# Altium PCB WPT_Transmitter.PcbDoc
Units mil, origin at the board's own origin, x right, y up, seen from the top; angles counter-clockwise.
Board outline 1110 x 1190 mil, 2 copper layers (Top Layer, Bottom Layer); 13 components, 7 nets, 33 pads, 0 vias.
Unrouted connection lines stored in the file: 1.
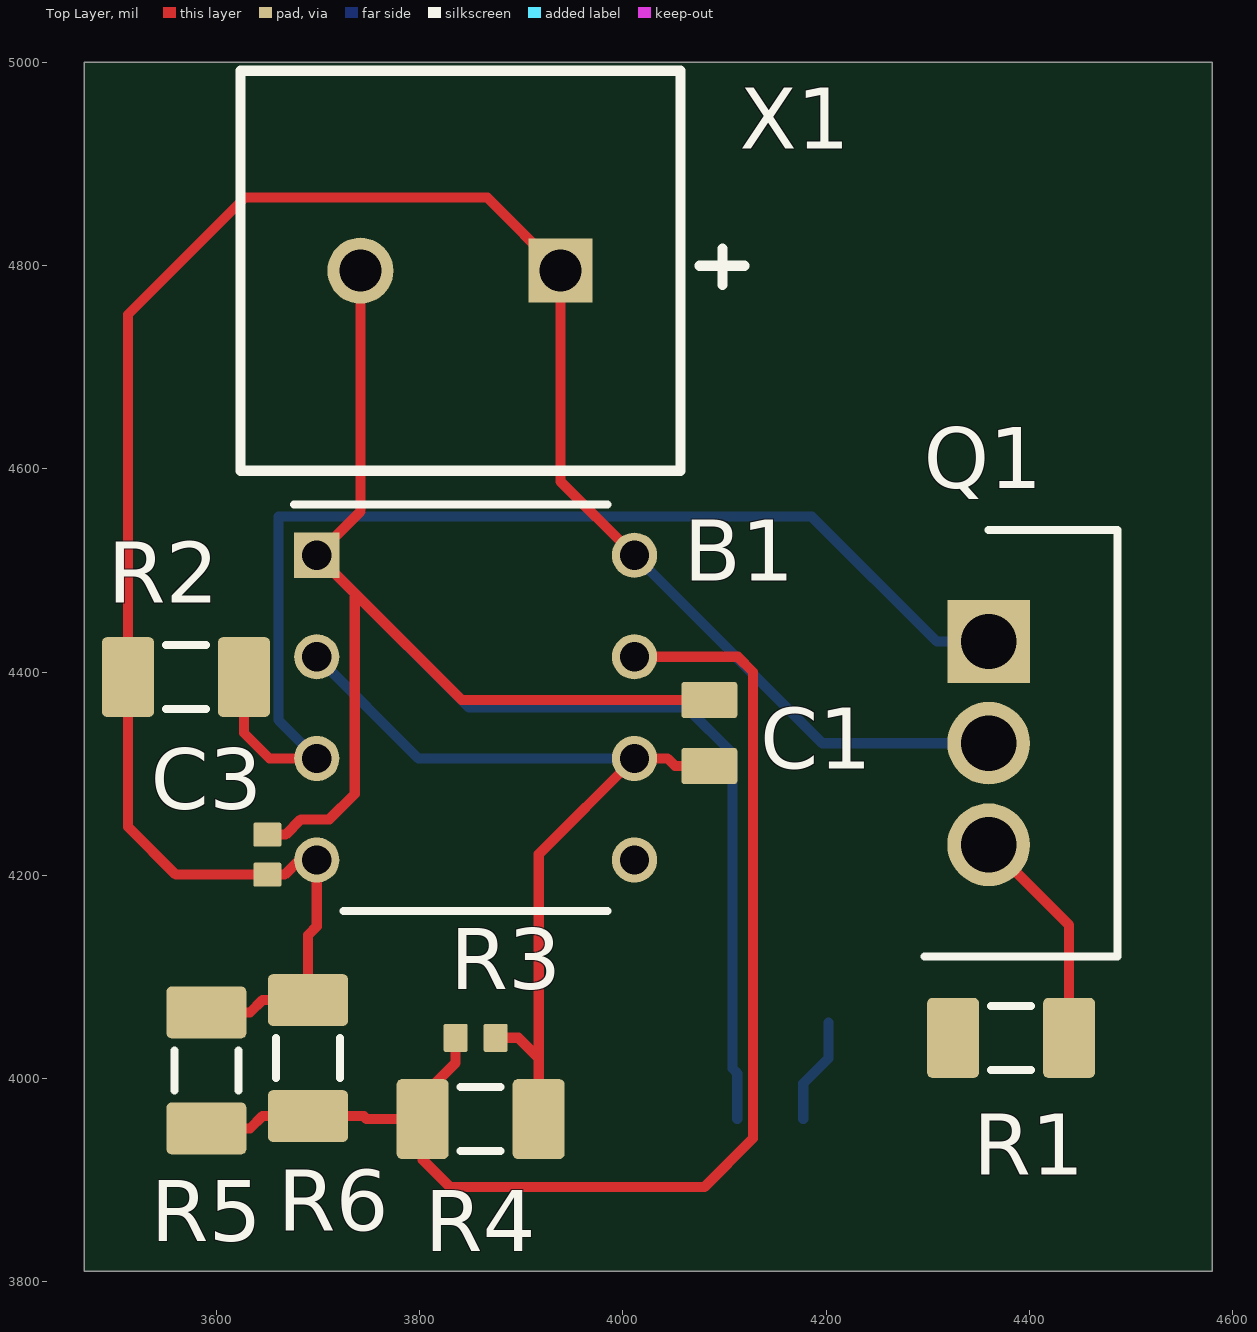
[diagram p0: Top Layer view]
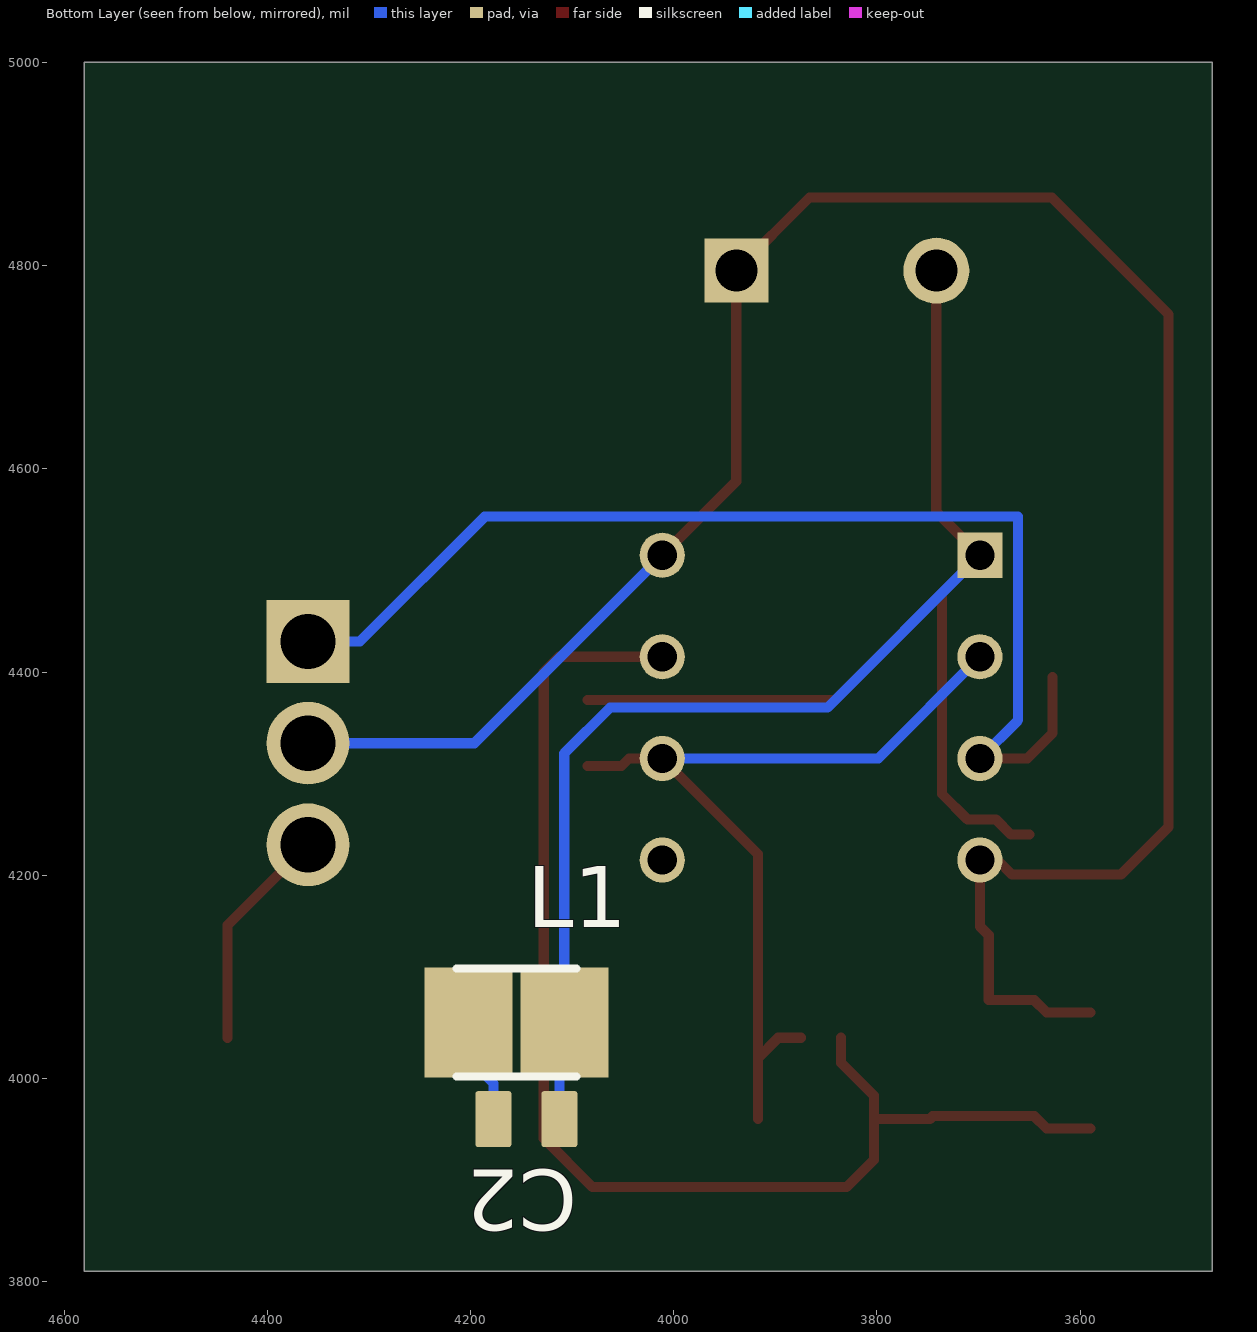
[diagram p1: Bottom Layer view, seen from below]
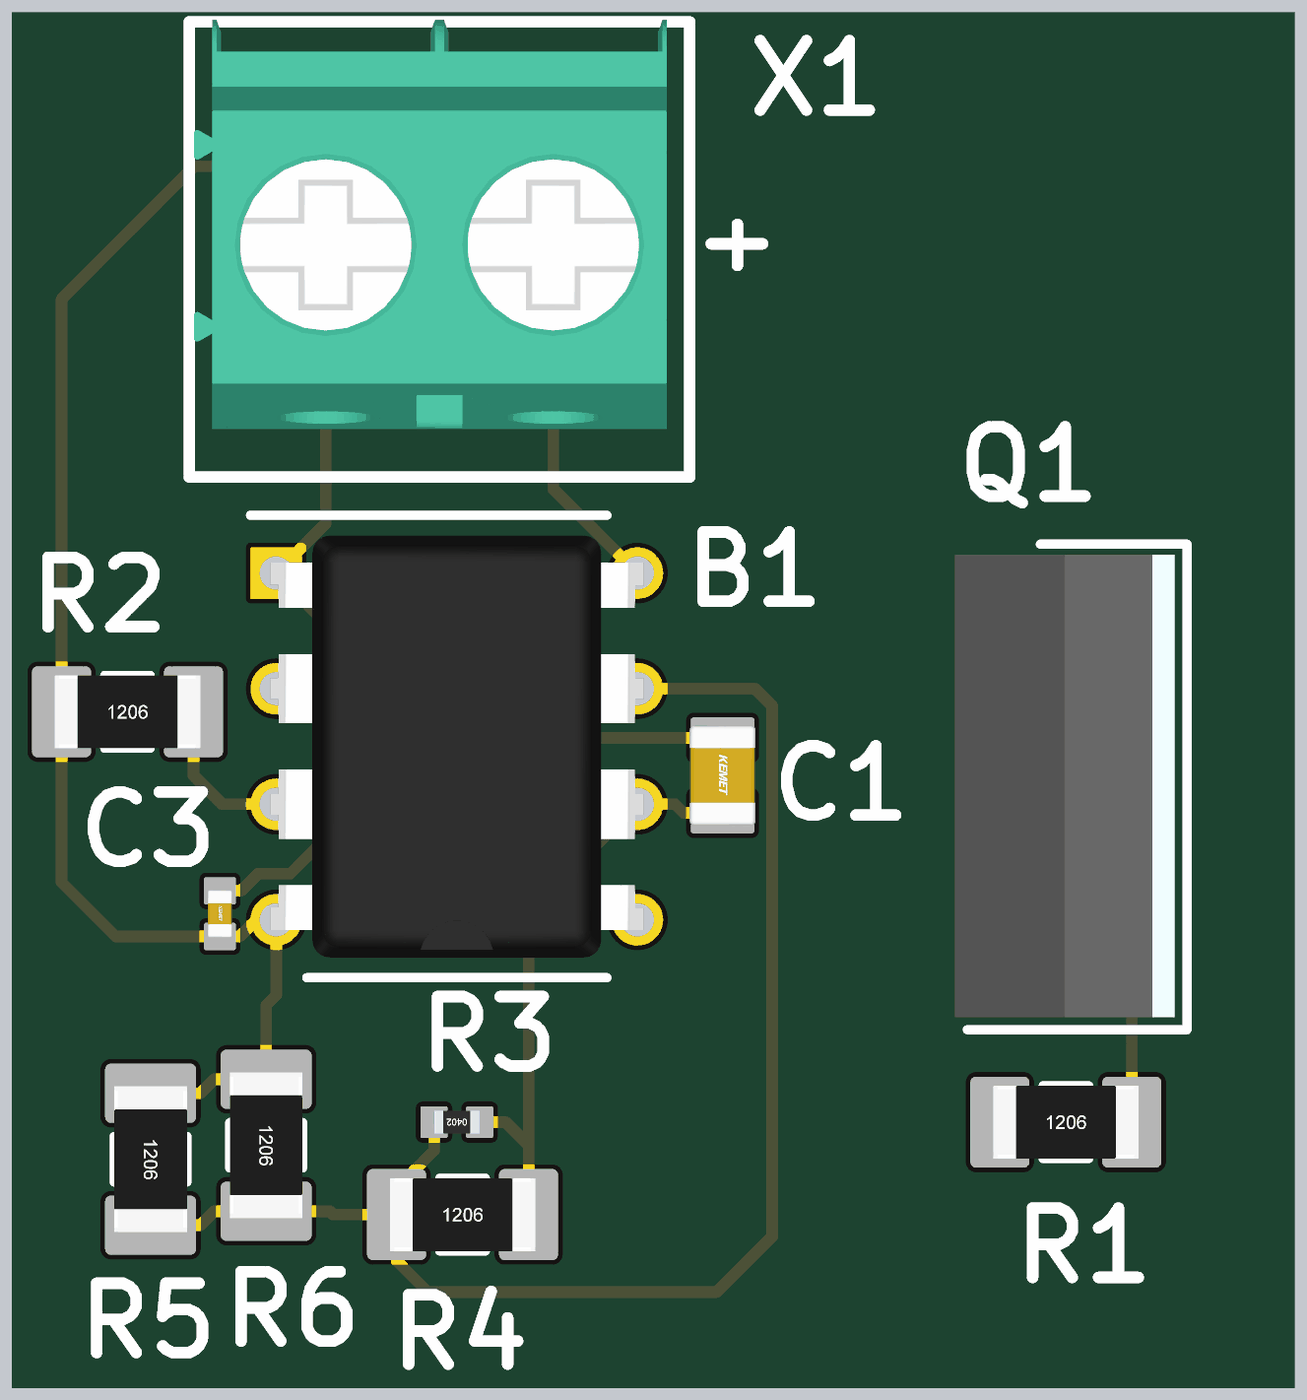
[diagram p2: 3D render of the assembled board from above, using the file's embedded part models]

## Layer stack, top to bottom
Top Solder: solder mask 0.4, Solder Resist, Dk 3.5
Top Layer: signal copper 1.4
Dielectric 1: dielectric 12.6, FR-4, Dk 4.8
Bottom Layer: signal copper 1.4
Bottom Solder: solder mask 0.4, Solder Resist, Dk 3.5

## Board outline
3470,3810 3470,5000 4580,5000 4580,3810

## Design rules (kind name [scope] priority, off if disabled: settings)
Clearance [All] p1: gap=10 ignorepadtopadclearanceinfootprint=FALSE except(0: Arc-Hole Track-Hole SMDPad-Hole THPad-Hole Via-Hole Fill-Hole Poly-Hole Region-Hole Text-Hole)
PolygonConnect [All] p1: connectstyle=Relief reliefconductorwidth=10 reliefentries=4 polygonreliefangle="90 Angle" airgapwidth=10
RoomDefinition Sheet1 [InComponentClass('Sheet1')] p1: confinementstyle=ConfineIn formatcopy=TRUE lockcomponents=FALSE outline 5680,2900 6222.76,2900 6222.76,2400 5680,2400
RoutingVias [All] p1: holewidth=28 width=50 viastyle="Through Hole" minholewidth=28 minwidth=50 maxholewidth=28 maxwidth=50
SolderMaskExpansion [All] p1: expansion=4 istentingtop=FALSE
Width [All] p1: maxlimit=10 minlimit=10 preferedwidth=10
30 further rules are at their usual default settings.

## Components (designator, comment, footprint, x,y, rotation, side; value= is the part's Value field where it differs from the comment)
B1 "NE555P" DIP794W53P254L959H508Q8N 3855,4365 r0 top
C1 "GRM1555C1H102JA01D" CAP0805 4085,4340 r270 top value=1nF
C2 "CL21A106KOCLRNC" CAP0805 4145,3960 r0 bottom value=10μF
C3 "KGM05AR71C103KH" CAP0402 3650,4220.31 r270 top value=0.01μF
L1 "SRN3015-2R2M" INDPM3027X150N 4155,4055 r0 bottom
Q1 "IRFZ44NPBF" TO254P483X1016X1994-3P 4360,4430 r270 top
R1 "RNCP1206FTD10R0" RES1206 4382.09,4040 r0 top value=10Ω
R2 "RNCP1206FTD1K00" RES1206 3570,4395 r0 top value=1kΩ
R3 "RC0402FR-0713KL" RES0402 3855,4040 r180 top value=13kΩ
R4 "RNCP1206FTD1K00" RES1206 3860,3960 r0 top value=1kΩ
R5 "CRGP1206F470R" RES1206 3590,4007.91 r270 top value=470Ω
R6 "RNCP1206FTD1K00" RES1206 3690,4020 r270 top value=1kΩ
X1 "1934861" 1934861 3840,4795 r180 top

## Footprints (in the part's own frame and the unit in brackets; to place one, negate y for a bottom-side part, rotate by r counter-clockwise, add the part's x,y. Pads: shape width x height; smd on the part's side, far side on the other; paste and mask are expansions set on the pad)
1934861 [mm]
  rect 1.6x1.6 hole 1.05 mask+0.05: 1(-2.5,0)
  round 1.65 hole 1.05 mask+0.05: 2(2.5,0)
  silkscreen extent -7.1,-5 5.5,5, body extent -5,-5.05 5.4,3.95, height 11.41
CAP0402 [mm] "Chip Capacitor, Body 1x0.5mm, Height 0.35mm, IPC Medium Density"
  rrect15% 0.6x0.7 smd: 1(-0.5,0) 2(0.5,0)
  body extent -0.53,-0.28 0.52,0.27, height 0.54
CAP0805 [mm] "Chip Capacitor, Body 2.0x1.2mm, Height 0.45mm, IPC Medium Density"
  rrect15% 0.9x1.4 smd: 1(-0.825,0) 2(0.825,0)
  body extent -1.1,-0.73 1.1,0.72, height 1.39
DIP794W53P254L959H508Q8N [mm]
  rect 1.13x1.13 / inner round 1.13 / far side rect 1.13x1.13 hole 0.73: 1(-3.97,3.81)
  round 1.13 hole 0.73: 2(-3.97,1.27) 3(-3.97,-1.27) 4(-3.97,-3.81) 5(3.97,-3.81) 6(3.97,-1.27) 7(3.97,1.27) 8(3.97,3.81)
  silkscreen extent -4.54,-5.08 3.3,5.08, body extent -4.1,-4.64 4.1,4.64, height 4.21
INDPM3027X150N [mm]
  rect 2.2x2.75 smd: 1(-1.2,0) 2(1.2,0)
  silkscreen extent -1.5,-1.35 1.5,1.35, body extent -1.5,-1.35 1.5,1.35, height 1.5
RES0402 [mm] "Chip Resistor, Body 1x0.5mm, IPC Medium Density"
  rrect15% 0.6x0.7 smd: 1(-0.5,0) 2(0.5,0)
  body extent -0.5,-0.25 0.5,0.25, height 0.27
RES1206 [mm] "Chip Resistor, Body 3.2x1.6mm, IPC Medium Density"
  rrect20% 1.3x2 smd: 1(-1.45,0) 2(1.45,0)
  silkscreen extent -0.5,-0.8 0.5,0.8, body extent -1.6,-0.8 1.6,0.8, height 0.61
TO254P483X1016X1994-3P [mm]
  rect 2.07x2.07 / inner round 2.07 / far side rect 2.07x2.07 hole 1.38: 1(0,0)
  round 2.07 hole 1.38: 2(2.54,0) 3(5.08,0)
  silkscreen extent -2.8,-1.6 7.88,3.22, body extent -2.56,-1.88 7.6,2.95, height 18.86

## Part data
B1: library part NE555P_1, "Precision timer,NE555P 0.5MHz DIL8 Texas Instruments NE555P, Precision Timer, 4.5  16 V, 8-Pin PDIP", Manufacturer_Name="Texas Instruments", Mouser Part Number=595-NE555P, Datasheet Link=http://www.ti.com/lit/ds/symlink/ne555.pdf, Geometry.Height=5.08mm, Manufacturer_Part_Number=NE555P, Mouser Price/Stock=https://www.mouser.co.uk/ProductDetail/Texas-Instruments/NE555P?qs=rkhjVJ6%2F3EIf4CWgjIKuKQ%3D%3D
C1: "CAP CER 1000PF 50V C0G/NP0 0402", Manufacturer 1="Murata Electronics", Manufacturer Part Number 1=490-3244-2-ND, Supplier Part Number 1=1276-2399-2-ND, Voltage Rating=50V, Supplier 1=Digi-Key
C2: "CAP CER 10UF 16V X5R 0805", Manufacturer 1="Samsung Electro-Mechanics", Supplier Part Number 1=1276-2399-2-ND, Voltage Rating=16V, Manufacturer Part Number 1=CL21A106KOCLRNC, Supplier 1=Digi-Key
C3: "CAP CER 10000PF 16V X7R 0402", Manufacturer 1="KYOCERA AVX", Supplier Part Number 1=478-KGM05AR71C103KHTR-ND, Voltage Rating=16V, Manufacturer Part Number 1=KGM05AR71C103KH, Supplier 1=Digi-Key
L1: "Power Inductor semi-shielded SMD 2.2uH Bourns SRN3015 Series Shielded Wire-wound SMD Inductor with a Ferrite Core, 2.2 uH +/-20% 1.8A Idc", Manufacturer_Name=Bourns, Mouser Part Number=652-SRN3015-2R2M, Geometry.Height=1.5mm, Manufacturer_Part_Number=SRN3015-2R2M, Mouser Price/Stock=https://www.mouser.co.uk/ProductDetail/Bourns/SRN3015-2R2M?qs=opBjA1TV9012ipbB8adgog%3D%3D
Q1: "MOSFET N-Channel 55V 49A TO220AB Infineon IRFZ44NPBF N-channel MOSFET Transistor, 49 A, 55 V, 3-Pin TO-220AB", Manufacturer_Name=Infineon, Mouser Part Number=942-IRFZ44NPBF, Datasheet Link=https://www.infineon.com/dgdl/irfz44npbf.pdf?fileId=5546d462533600a40153563b3a9f220d, Geometry.Height=4.83mm, Manufacturer_Part_Number=IRFZ44NPBF, Mouser Price/Stock=https://www.mouser.co.uk/ProductDetail/Infineon-Technologies/IRFZ44NPBF?qs=9%252BKlkBgLFf24zghzPg2f9g%3D%3D
R1: "10 Ohms ±1% 0.5W, 1/2W Chip Resistor 1206 (3216 Metric) Anti-Sulfur Thin Film", Manufacturer 1="Stackpole Electronics Inc", Power Rating=1/2W, Supplier Part Number 1=RNCP1206FTD10R0TR-ND, Manufacturer Part Number 1=RNCP1206FTD10R0, Supplier 1=Digi-Key
R2 R4 R6: "RES 1K OHM 1% 1/2W 1206", Manufacturer 1="Stackpole Electronics Inc", Power Rating=1/2W, Supplier Part Number 1=RNCP1206FTD1K00TR-ND, Manufacturer Part Number 1=RNCP1206FTD1K00, Supplier 1=Digi-Key
R3: "RES 13K OHM 1% 1/16W 0402", Manufacturer 1=YAGEO, Power Rating=1/16W, Supplier Part Number 1=311-13.0KLRTR-ND, Manufacturer Part Number 1=RC0402FR-0713KL, Supplier 1=Digi-Key
R5: "RES 470 OHM 1% 1/2W 1206", Manufacturer 1="TE Connectivity Passive Product", Power Rating=1/2W, Supplier Part Number 1=A130534TR-ND, Manufacturer Part Number 1=CRGP1206F470R, Supplier 1=Digi-Key

## Nets (pads, with @x,y where several pads share a name; then routed paths per layer and width w, separated by ;. In a path a pad name is that pad's centre, name@x,y a point inside that pad or via, vN(x,y) a via of type N, cw(c..) or ccw(c..) an arc to the next point about the centre after c; other vN are vias at no path point)
+5: B1.4 B1.8 C3.2 Q1.2 R2.1 R5.1 R6.1 X1.1 | length 2200.5
  Top Layer w10: R5.1 3633,4065 3645.09,4077.09 R6.1 3690,4141 3698.7,4149.7 B1.4 3681.37,4215 3667,4200.63 C3.2 3560,4200.63 3512.91,4247.72 R2.1 3512.91,4751.91 3628,4867 3866.43,4867 X1.1 3938.43,4587.87 B1.8
  Bottom Layer w10: B1.8 4196.3,4330 Q1.2
GND: B1.1 C1.1 C2.1 C3.1 L1.1 X1.2 | length 1895.2
  Top Layer w10: C3.1 3668.03,4240 3683.03,4255 3711,4255 3736,4280 3736,4477.7 ; X1.2 3741.57,4557.87 B1.1 3736,4477.7 ; C1.1 3841.22,4372.48 3736,4477.7
  Bottom Layer w10: B1.1 3848.7,4365 4062.76,4365 4107.76,4320 L1.1 4107.76,4009.76 4112.52,4005 C2.1
NetB1_2: B1.2 B1.6 C1.2 R3.1 R4.2 | length 875.5
  Top Layer w10: R3.1 3897.09,4040 3917.09,4020 ; R4.2 3917.09,4020 ; C1.2 4051.48,4307.52 4044,4315 B1.6 3917.09,4220.79 3917.09,4020
  Bottom Layer w10: B1.2 3798.7,4315 B1.6
NetB1_3: B1.3 Q1.1 R2.2 | length 1140.5
  Top Layer w10: R2.2 3627.09,4340 3652.09,4315 B1.3
  Bottom Layer w10: B1.3 3661,4352.7 3661,4553 4186,4553 4309,4430 Q1.1
NetB1_7: B1.7 R3.2 R4.1 R5.2 R6.2 | length 1290.6
  Top Layer w10: R5.2 3633,3950.83 3645.09,3962.91 R6.2 3745,3962.91 3747.91,3960 R4.1 ; R3.2 3835.32,4015.4 3802.91,3983 R4.1 ; B1.7 4113,4415 4128,4400 4128,3941 4080,3893 3829.91,3893 3802.91,3920 R4.1
NetC2_2: C2.2 L1.2 R1.1 | length 105.3
  Bottom Layer w10: C2.2 4177.48,3995 4202.24,4019.76 L1.2
NetQ1_3: Q1.3 R1.2 | length 222.8
  Top Layer w10: Q1.3 4439.17,4150.83 R1.2
pads on no net: B1.5

## Silkscreen, mask and mechanical layers (free items; w line width, h text height)
Mechanical 1:
  the board outline again, w10